# Altium PCB PCB1.PcbDoc
Units mm, origin at the board's own origin, x right, y up, seen from the top; angles counter-clockwise.
Board outline 60 x 50 mm, 2 copper layers (Top Layer, Bottom Layer); 20 components, 10 nets, 47 pads, 0 vias.
Unrouted connection lines stored in the file: 1.
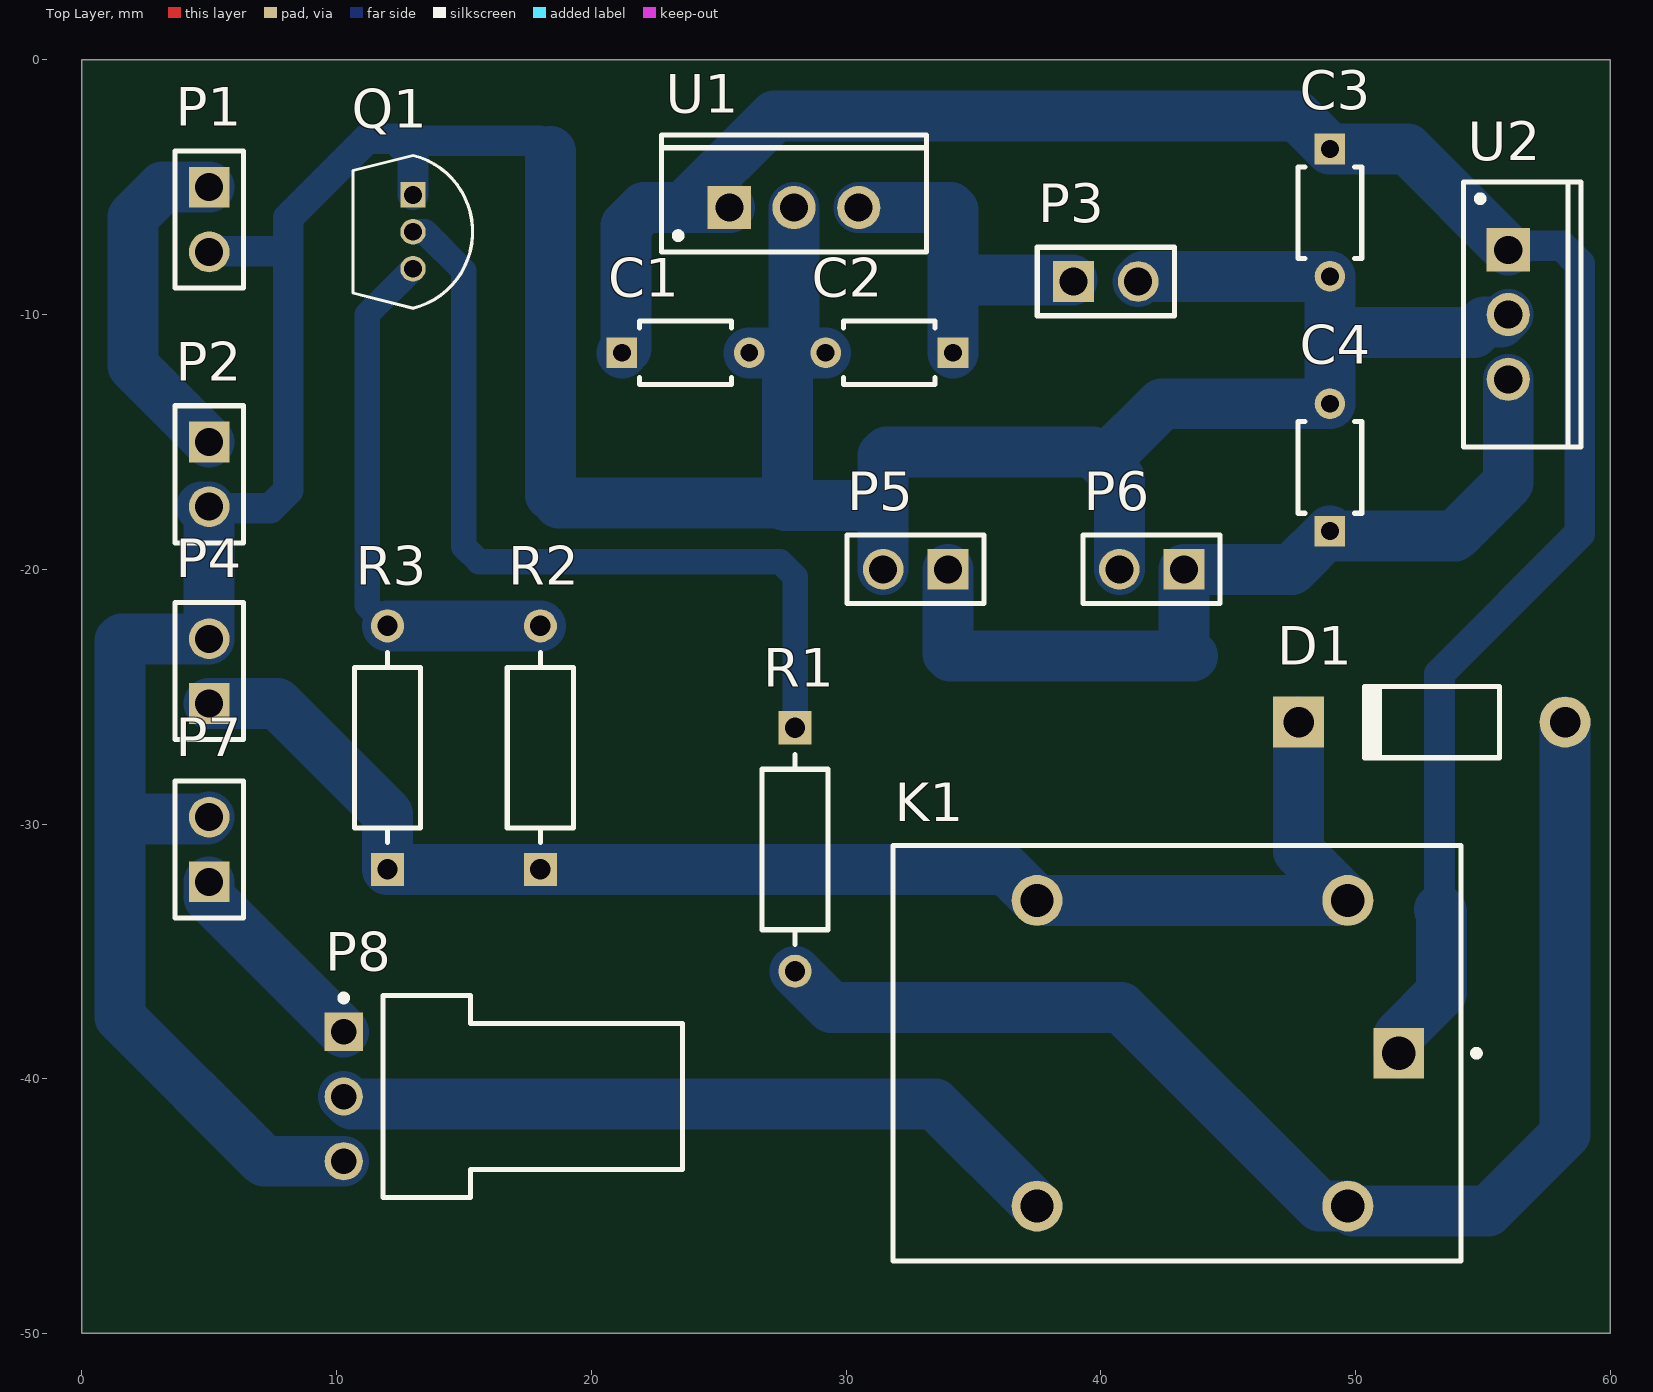
[diagram p0: Top Layer view]
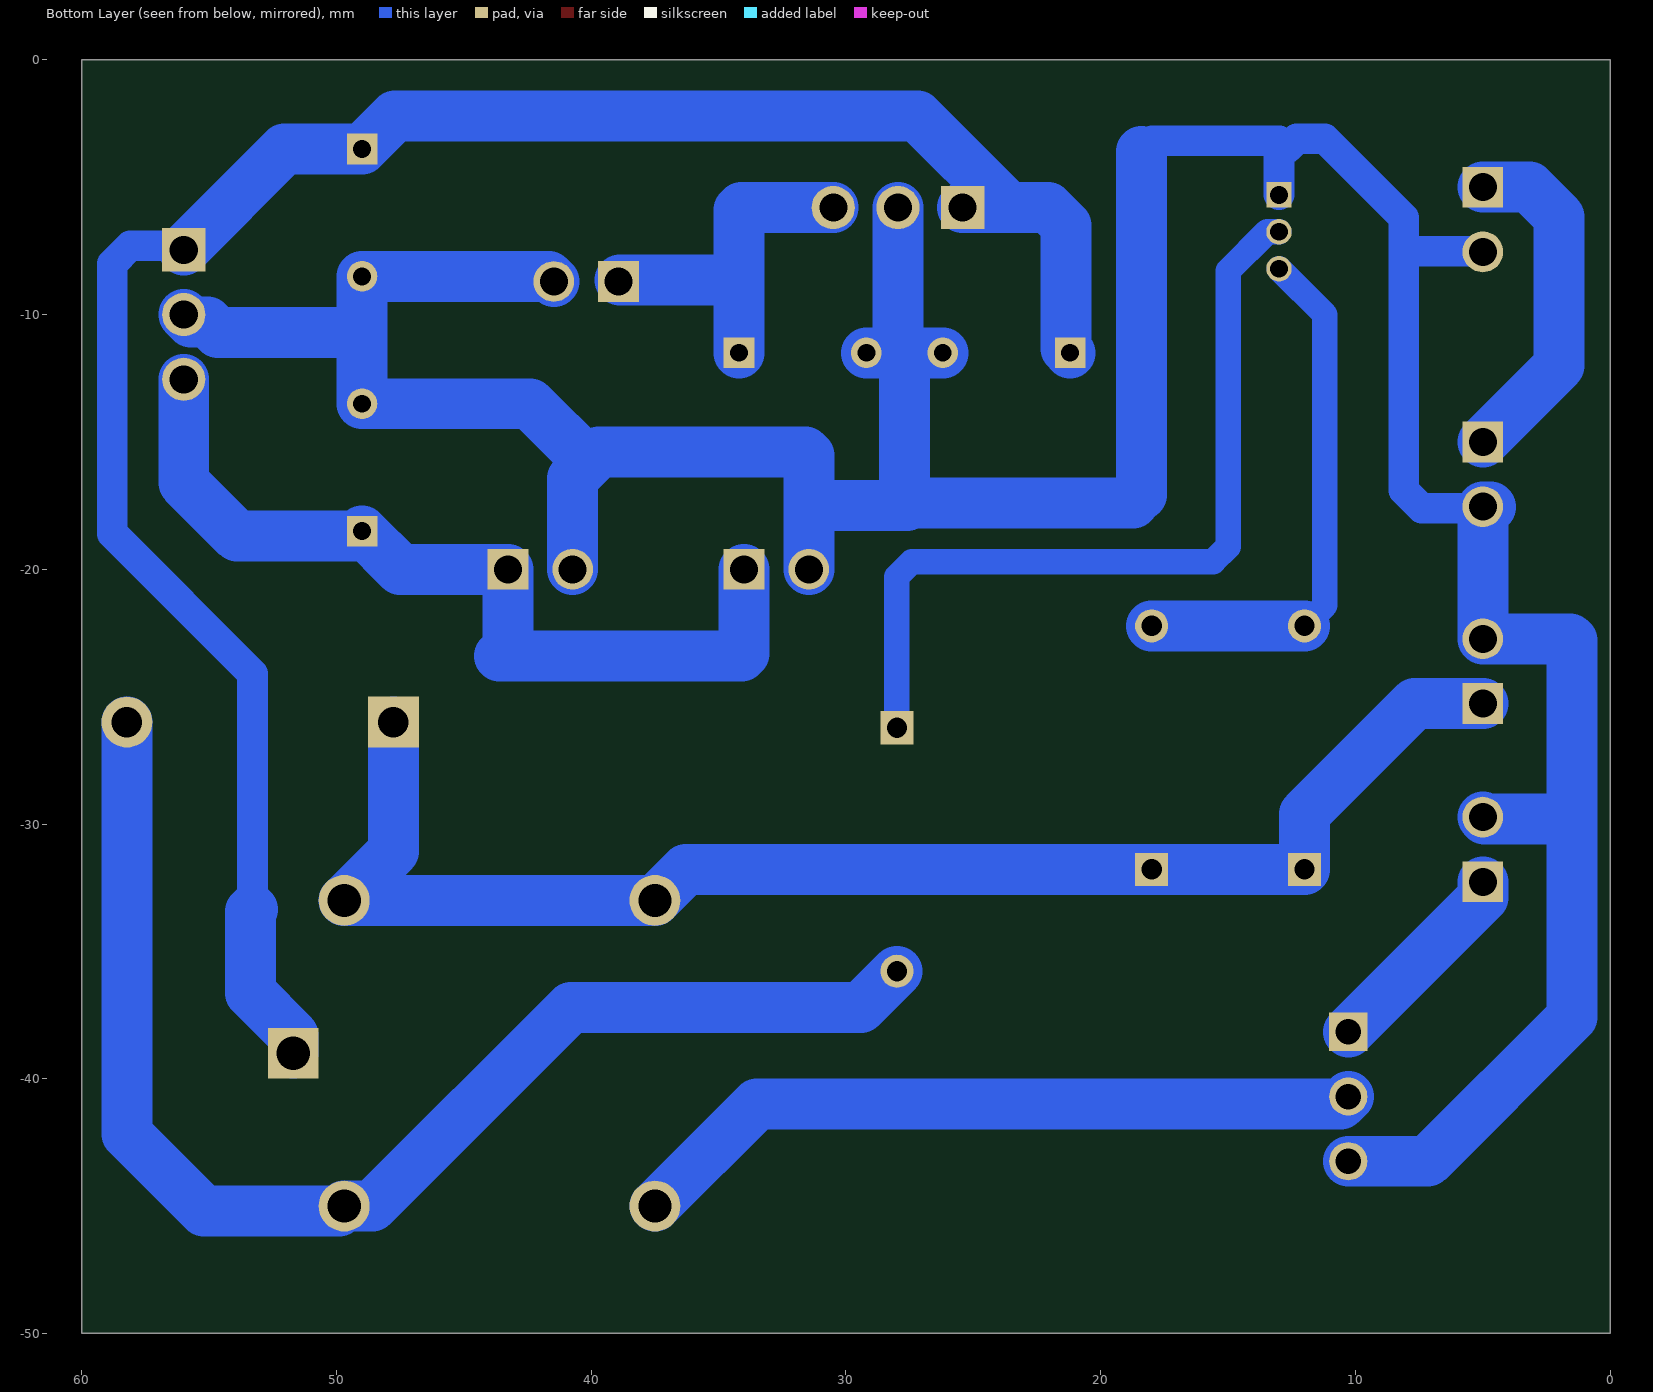
[diagram p1: Bottom Layer view, seen from below]
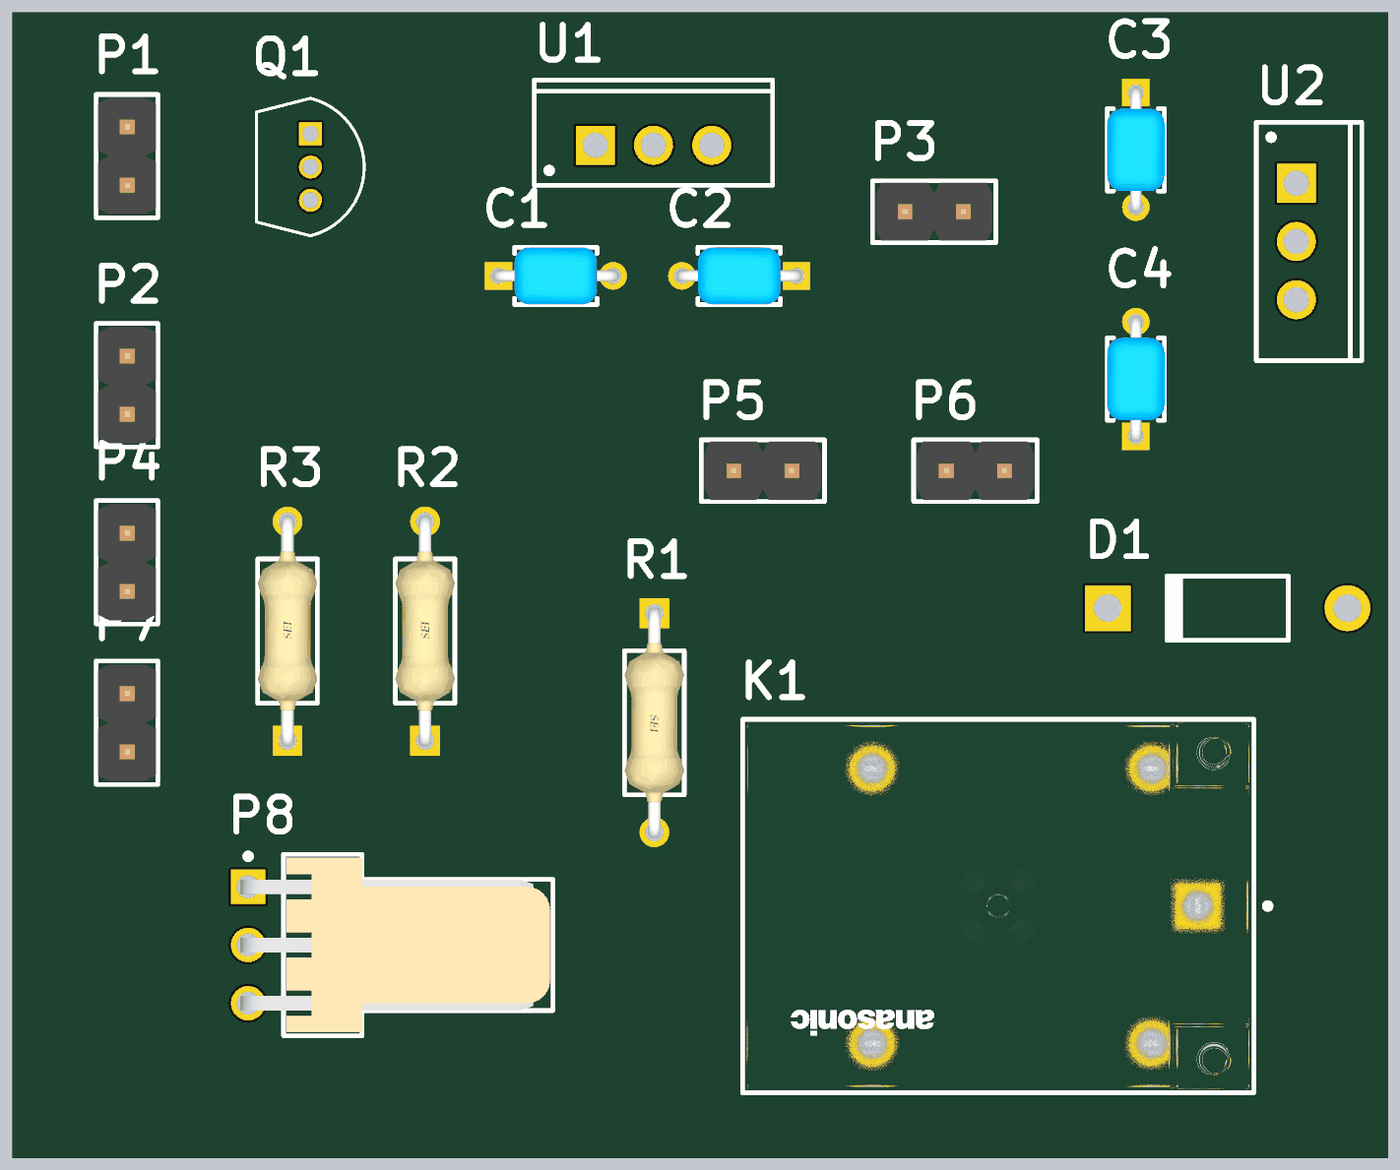
[diagram p2: 3D render of the assembled board from above, using the file's embedded part models]

## Layer stack, top to bottom
Top Solder: solder mask 0.0102, Solder Resist, Dk 3.5
Top Layer: signal copper 0.0356
Dielectric 1: dielectric 0.32, FR-4, Dk 4.8
Bottom Layer: signal copper 0.0356
Bottom Solder: solder mask 0.0102, Solder Resist, Dk 3.5

## Board outline
0,-50 60,-50 60,0 0,0

## Design rules (kind name [scope] priority, off if disabled: settings)
Clearance [All] p1: gap=0.254 ignorepadtopadclearanceinfootprint=FALSE except(0: Arc-Hole Track-Hole SMDPad-Hole THPad-Hole Via-Hole Fill-Hole Poly-Hole Region-Hole Text-Hole)
PolygonConnect [All] p1: connectstyle=Relief reliefconductorwidth=0.254 reliefentries=4 polygonreliefangle="90 Angle" airgapwidth=0.254
RoutingVias [All] p1: holewidth=0.711 width=1.27 viastyle="Through Hole" minholewidth=0.711 minwidth=1.27 maxholewidth=0.711 maxwidth=1.27
SolderMaskExpansion [All] p1: expansion=0.102 istentingtop=FALSE
Width [All] p1: maxlimit=4 minlimit=0.254 preferedwidth=0.254
30 further rules are at their usual default settings.

## Components (designator, comment, footprint, x,y, rotation, side; value= is the part's Value field where it differs from the comment)
C1 "104" FP-RCE0K1-MFG 23.7,-11.5 r0 top
C2 "104" FP-RCE0K1-MFG 31.7,-11.5 r180 top
C3 "104" FP-RCE0K1-MFG 49,-6 r270 top
C4 "104" FP-RCE0K1-MFG 49,-16 r90 top
D1 "Diode 1N4001" DO-41 53,-26 r180 top
K1 "Relay" FP-JS1-5V-F-MFG 43,-39 r180 top
P1 "12V IN Supply" 61300211121 5,-6.27 r270 top
P2 "12V IN MT3608" 61300211121 5,-16.27 r270 top
P3 "Router" 61300211121 40.2,-8.7 r0 top
P4 "14.8V Out MT3608" 61300211121 5,-24 r90 top
P5 "USB Module" 61300211121 32.73,-20 r180 top
P6 "LED Strip" 61300211121 42,-20 r180 top
P7 "14.8V Battery" 61300211121 5,-31 r90 top
P8 "Battery Level Indicator" 61900319521 17.7,-40.7 r90 top
Q1 "2SD400" TO145P470X600X850-3P 13,-6.75 r0 top
R1 "PCF14JT7K50" FP-CF14-MFG 28,-31 r270 top
R2 "PCF14JT7K50" FP-CF14-MFG 18,-27 r90 top
R3 "PCF14JT7K50" FP-CF14-MFG 12,-27 r90 top
U1 "L7812CV" TO220 27.96,-5.8 r0 top
U2 "L7805CV" TO220 56,-10 r270 top

## Footprints (in the part's own frame and the unit in brackets; to place one, negate y for a bottom-side part, rotate by r counter-clockwise, add the part's x,y. Pads: shape width x height; smd on the part's side, far side on the other; paste and mask are expansions set on the pad)
61300211121 [mm] "Pin Header, pitch 2.54 mm, THT, Vertical, single row, 2p"
  rect 1.6x1.6 hole 1.1: 1(-1.27,0)
  round 1.6 hole 1.1: 2(1.27,0)
  silkscreen extent -2.69,-1.35 2.69,1.35, body extent -2.54,-1.27 2.54,1.27, height 8.57
61900319521 [mm] "2.54mm Male Right Angled Locking Header Top Locking, 3p"
  rect 1.5x1.5 hole 1: 1(2.54,7.42)
  round 1.5 hole 1: 2(0,7.42) 3(-2.54,7.42)
  silkscreen extent -3.96,-5.87 3.99,7.54, body extent -3.81,-5.75 3.81,7.77, height 5.83
DO-41 [mm] "Diode, Axial; Body 5.2 x 2.7 mm (LxDia. max), Lead Dia. 0.86 mm (max)"
  round 2 hole 1.2: 1(-5.23,0)
  rect 2x2 hole 1.2: 2(5.23,0)
  silkscreen extent -2.65,-1.4 2.75,1.4
FP-CF14-MFG [mm]
  rect 1.3x1.3 hole 0.8 paste-1000 mask+0: 1(-4.78,0)
  round 1.3 hole 0.8 paste-1000 mask+0: 2(4.78,0)
  silkscreen extent -3.73,-1.3 3.73,1.3, body extent -5.53,-1.4 5.53,1.4, height 0.25
FP-JS1-5V-F-MFG [mm]
  rect 2x2 hole 1.3 paste-1000 mask+0: 1(-8.7,0)
  round 2 hole 1.3 paste-1000 mask+0: 2(-6.7,-6) 3(5.5,-6) 4(5.5,6) 5(-6.7,6)
  silkscreen extent -11.88,-8.15 11.15,8.15, body extent -11.25,-8.25 11.25,8.25, height 0.25
FP-RCE0K1-MFG [mm]
  rect 1.2x1.2 hole 0.7 paste-1000 mask+0: 1(-2.5,0)
  round 1.2 hole 0.7 paste-1000 mask+0: 2(2.5,0)
  silkscreen extent -1.8,-1.25 1.8,1.25, body extent -3.2,-1.35 3.2,1.35, height 0.25
TO145P470X600X850-3P [mm]
  rect 1x1 hole 0.7: 1(0,1.45)
  round 1 hole 0.7: 2(0,0) 3(0,-1.45)
  silkscreen extent -2.35,-3 2.34,3
TO220 [mm] "TO, Thru-Hole, Vertical, Heatsink Mounted; 3 In-Line Leads; Pitch 2.54 mm"
  rect 1.7x1.7 hole 1.1: 1(-2.54,0)
  round 1.7 hole 1.1: 2(0,0) 3(2.54,0)
  silkscreen extent -5.2,-1.75 5.2,2.85, body extent -5.25,-1.8 5.25,2.9, height 19.7

## Part data
C1 C2 C3 C4: library part CMP-06035-043061-1, "Cap Ceramic 1pF 100V C0G ±0.25pF Radial 5mm +125°C Automotive Bulk", Capacitance=1pF, Case/Package=Radial, Dielectric=C0G, Max Operating Temperature=125°C, Min Operating Temperature=-55°C, Package Quantity=2000, Ratings=AEC-Q200, Resistor Type=Ceramic, Voltage Rating=100V, Height=3.5mm, Height - Seated (Max)=0.138inch, Lead Diameter=0.5mm, Lead Pitch=0.197inch, Lead/Base Style="Formed Leads", Length=0.142inch, Mount="Through Hole", Packaging="Tape and Reel", Termination=Radial, Voltage Rating (DC)=100V, Width=0.098inch
D1: "1 Amp General Purpose Rectifier", Code_JEDEC=DO-204-AL, ComponentLink1Description="Manufacturer Link", ComponentLink1URL=http://www.fairchildsemi.com/, ComponentLink2Description=Datasheet, ComponentLink2URL=http://www.fairchildsemi.com/ds/1N%2F1N4001.pdf, DatasheetVersion=1998, LatestRevisionDate=17-Jul-2002, LatestRevisionNote="Re-released for DXP Platform.", PackageDescription="Diode, Axial; Body 5.2 x 2.7 mm (LxDia. max), Lead Dia. 0.86 mm (max)", PackageReference=DO-41, PackageVersion=Aug-1999, Published=8-Jun-2000, Publisher="Altium Limited"
K1: library part CMP-05606-000016-1, "RELAY GEN PURPOSE SPDT 10A 5V", Ambient Temperature Range High=+70°C, Ambient Temperature Range Low=-40°C, Coil Current=72mA, Coil Power=360mW, Coil Resistance=69.4Ω, Coil Voltage=5V, Manufacturer=Panasonic, Manufacturer Part Number=JS1-5V-F, Switching Current=10A, Switching Power=150W, Temperature="-40°C to +70°C", Automotive=No, Category=Relay, Coil Type=Non-Latching, ComponentLink2Description=Datasheet, ComponentLink2URL=https://www3.panasonic.biz/ac/e_download/control/relay/power/catalog/mech_eng_js.pdf?via=ok, Device Class L1=Electromechanical, Device Class L2=Relays, Device Class L3="Power Relays", Digikey Description="RELAY GEN PURPOSE SPDT 10A 5V", Height=16.8mm, Lead Free=Yes, Mouser Description="JS Series 10 A SPDT 5 V Through Hole Sealed Miniature Non-Polarized Power Relay", Number Of Contacts=1, Octopart=https://octopart.com/js1-5v-f-panasonic-39428621, Package=JS1-5V-F, RoHS=TRUE, Standoff Height=0.3mm, Temperature Range High=+70°C, Temperature Range Low=-40°C, Throw Configuration=SPDT
P1 P2 P3 P4 P5 P6 P7: library part CMP-1712-00002-4, "THT Vertical Pin Header WR-PHD, Pitch 2.54 mm, Single Row, 2 pins", Contact Resistance=20mOhm, Manufacturer="Wurth Elektronik", Operating Temperature=-40to105degC, Package Reference=61300211121, Rated Current=3A, Withstanding Voltage=500VAC, Working Voltage=250VAC, Datasheet URL=https://katalog.we-online.de/em/datasheet/6130xx11121.pdf, Gender=Male, Manufacturer URL=http://www.we-online.de, Mounting Technology=THT, Orientation=Vertical, Packaging=Bag, Part Number=61300211121, Pin Number=2, Pitch=2.54mm, Publisher=WurthElektronik, Row Number=Single
P8: library part CMP-1502-00600-1, "Male Top Locking Header WR-WTB, THT, Right Angled, pitch 2.54 mm, 1 x 3 position", Contact Resistance=20mOhm, Manufacturer="Wurth Elektronik", Operating Temperature=-40to105degC, Package Reference=61900319521, Working Voltage=250VAC, Datasheet URL=https://katalog.we-online.de/em/datasheet/6190xx19521.pdf, Gender=Male, Manufacturer URL=http://www.we-online.de, Mounting Technology=THT, Orientation=RightAngled, Packaging=Bag, Part Number=61900319521, Pitch=2.54mm, Position=1x3, Publisher=WurthElektronik
Q1: "Connector Header Through Hole 20 position 0.100 _2.54mm_", Package=None, Availability=Unavailable, MF="Samtec Inc.", MP=2SD400, Price=None, SnapEDA_Link=https://www.snapeda.com/parts/2SD400/Samtec%20Inc./view-part/627662/?ref=snap
R1: library part CMP-26528-000003-1, "RES 7.5K OHM 1/4W 5% AXIAL", Case/Package=Axial, Max Operating Temperature=155°C, Max Power Dissipation=250mW, Min Operating Temperature=-55°C, Resistance=220R, Resistor Type="Carbon Film", Temperature Coefficient=-400ppm/°C, Tolerance=5%, Contact Plating=Tin, Diameter=2.3mm, Features="Flame Retardant Coating", Lead Free="Lead Free", Length=0.256inch, Mount="Through Hole", Number of Terminations=2, Packaging="Tape and Reel", Power Rating=250mW, Radiation Hardening=No, RoHS Compliant=Yes, Series=CF
R2 R3: library part CMP-26528-000003-1, "RES 7.5K OHM 1/4W 5% AXIAL", Case/Package=Axial, Max Operating Temperature=155°C, Max Power Dissipation=250mW, Min Operating Temperature=-55°C, Resistance=7.5K, Resistor Type="Carbon Film", Temperature Coefficient=-400ppm/°C, Tolerance=5%, Contact Plating=Tin, Diameter=2.3mm, Features="Flame Retardant Coating", Lead Free="Lead Free", Length=0.256inch, Mount="Through Hole", Number of Terminations=2, Packaging="Tape and Reel", Power Rating=250mW, Radiation Hardening=No, RoHS Compliant=Yes, Series=CF
U1: library part CMP-0244-00450-1, "Positive Voltage Regulator, 12V, 3-Pin TO-220", ComponentLink1Description="Manufacturer URL", ComponentLink1URL=http://www.st.com, ComponentLink2Description=Datasheet, ComponentLink2URL=http://www.st.com/internet/com/TECHNICAL_RESOURCES/TECHNICAL_LITERATURE/DATASHEET/CD00000444.pdf, ComponentLink3Description="Package Specification", ComponentLink3URL=http://www.st.com/internet/com/TECHNICAL_RESOURCES/TECHNICAL_LITERATURE/PACKAGE_INFORMATION/CD00004649.pdf, DatasheetVersion=16/11/2011, PackageDescription="TO, Thru-Hole, Vertical, Heatsink Mounted; 3 In-Line Leads; Pitch 2.54 mm", PackageReference=TO220, PackageVersion=ver3.0
U2: library part CMP-0244-00483-1, "Positive Voltage Regulator, 5V, 3-Pin TO-220", ComponentLink1Description="Manufacturer URL", ComponentLink1URL=http://www.st.com, ComponentLink2Description=Datasheet, ComponentLink2URL=http://www.st.com/internet/com/TECHNICAL_RESOURCES/TECHNICAL_LITERATURE/DATASHEET/CD00000444.pdf, ComponentLink3Description="Package Specification", ComponentLink3URL=http://www.st.com/internet/com/TECHNICAL_RESOURCES/TECHNICAL_LITERATURE/PACKAGE_INFORMATION/CD00004649.pdf, DatasheetVersion=16/11/2011, PackageDescription="TO, Thru-Hole, Vertical, Heatsink Mounted; 3 In-Line Leads; Pitch 2.54 mm", PackageReference=TO220, PackageVersion=ver3.0

## Nets (pads, with @x,y where several pads share a name; then routed paths per layer and width w, separated by ;. In a path a pad name is that pad's centre, name@x,y a point inside that pad or via, vN(x,y) a via of type N, cw(c..) or ccw(c..) an arc to the next point about the centre after c; other vN are vias at no path point)
+12: P1.1 P2.1 | length 13.6
  Bottom Layer w2: P2.1 2,-12 2,-6.172 3.172,-5 P1.1
+14V8: K1.4 P7.1 P8.1 P8.2 | length 37.1
  Bottom Layer w2: P7.1 5,-32.88 P8.1 ; P8.2 10.58,-41 33.5,-41 K1.4
GND: C1.2 C2.2 C3.2 C4.2 P1.2 P2.2 P3.2 P4.2 P5.2 P6.2 P7.2 P8.3 Q1.1 U1.2 U2.2 | length 159.2
  Bottom Layer w1.2: P2.2 5.06,-17.6 7.397,-17.6 8.1,-16.897 8.1,-7.511 ; P1.2@5.029,-7.511 8.1,-7.511 ; 12.69,-3.493 12.297,-3.1 11.2,-3.1 8.1,-6.2 8.1,-7.511 ; Q1.1 13,-3.183 17.983,-3.183 18.4,-3.6 ; 18.024,-16.697 18.727,-17.4 ; 27.6,-17.5 27.7,-17.4 ; 27.7,-11.5 27.96,-11.24 ; 31.06,-17.5 31.46,-17.9
  Bottom Layer w2: P2.2@4.7,-17.554 5,-17.554 P4.2 1.57,-22.73 1.5,-22.8 1.5,-29.8 ; P7.2 4.93,-29.8 1.5,-29.8 ; P8.3 7.163,-43.24 1.5,-37.577 1.5,-29.8 ; 18.4,-17.073 18.4,-3.6 ; 18.727,-17.4 27.7,-17.4 27.7,-11.5 ; C1.2 27.7,-11.5 ; 27.6,-17.5 31.06,-17.5 ; 27.96,-11.24 U1.2 ; C2.2 27.7,-11.5 ; P5.2 31.46,-17.9 31.46,-15.54 31.6,-15.4 39.7,-15.4 40.1,-15.8 ; P6.2 40.73,-16.43 40.1,-15.8 ; P3.2 41.67,-8.5 C3.2 49,-10.7 ; U2.2 55.714,-10.286 55.066,-10.286 54.652,-10.7 49,-10.7 ; 40.1,-15.8 42.4,-13.5 C4.2 49,-10.7
NetC1_1: C1.1 C3.1 K1.1 U1.1 U2.1 | length 82.6
  Bottom Layer w1.2: 53.3,-33.36 53.3,-24.1 58.8,-18.6 58.8,-8.003 58.097,-7.3 56.16,-7.3 U2.1
  Bottom Layer w2: C1.1 21.367,-11.333 21.367,-6.5 22.067,-5.8 23.6,-5.8 ; U1.1 23.6,-5.8 ; K1.1 51.7,-38.3 53.372,-36.628 53.372,-33.432 53.3,-33.36 ; U2.1 52.04,-3.5 C3.1 47.7,-2.2 27.2,-2.2 23.6,-5.8
NetC2_1: C2.1 P3.1 U1.3 | length 14.6
  Bottom Layer w1.2: 34.1,-5.8 34.2,-5.9 ; 36.9,-8.3 37.242,-8.642 ; P3.1@38.872,-8.642 P3.1
  Bottom Layer w2: U1.3 34.1,-5.8 ; C2.1 34.2,-8.642 ; 34.2,-5.9 34.2,-8.642 ; P3.1@38.872,-8.642 37.242,-8.642 34.2,-8.642
NetC4_1: C4.1 P5.1 P6.1 U2.3 | length 34.8
  Bottom Layer w2: P5.1 34,-23.3 34.1,-23.4 43.6,-23.4 43.27,-23.07 P6.1 47.5,-20 C4.1 49.2,-18.7 53.9,-18.7 56,-16.6 U2.3
NetD1_1: D1.1 K1.5 R1.2 | length 51.6
  Bottom Layer w1.2: K1.5 K1.5@49.9,-45.2
  Bottom Layer w2: R1.2 29.42,-37.2 40.8,-37.2 48.6,-45 K1.5 ; K1.5@49.9,-45.2 55.2,-45.2 58.23,-42.17 D1.1
NetD1_2: D1.2 K1.2 K1.3 P4.1 R2.1 R3.1 | length 57
  Bottom Layer w2: P4.1 7.67,-25.27 12,-29.6 R3.1 R2.1 36.28,-31.78 K1.3 K1.2 47.77,-31.07 D1.2
NetQ1_2: Q1.2 R1.1 | length 32.9
  Bottom Layer w1: Q1.2 13.464,-6.75 15,-8.286 15,-19.114 15.586,-19.7 27.414,-19.7 28,-20.286 R1.1
NetQ1_3: Q1.3 R2.2 R3.2 | length 21.1
  Bottom Layer w1: R3.2 11.2,-21.42 11.2,-10 Q1.3
  Bottom Layer w2: R3.2 R2.2